# EAGLE board top (EAGLE 9.3.0)
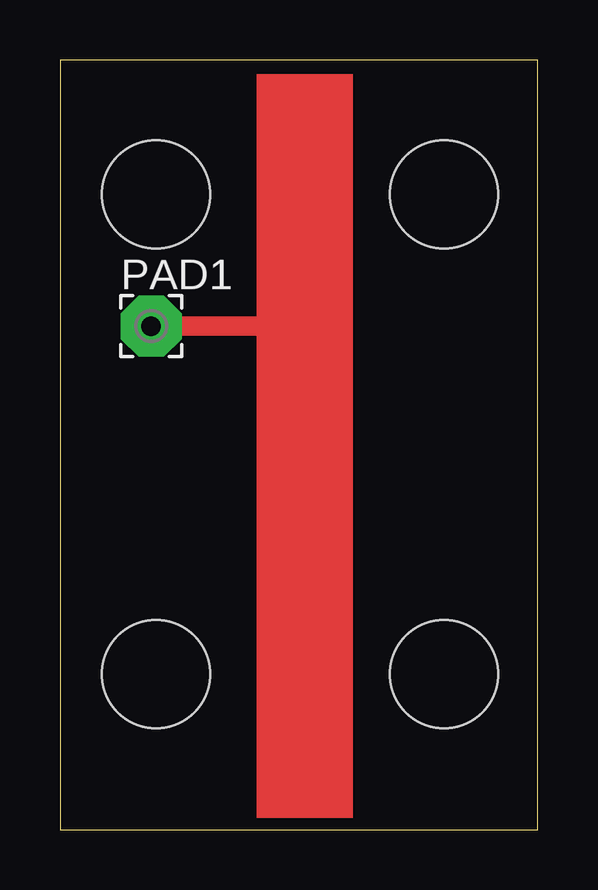
[diagram p0: board, top side]

Size 19.9 x 32.1 mm. Coordinates in mm from the lower left corner, seen from the top.
Outline: 0,0 19.9,0 19.9,32.1 0,32.1 0,0
Copper layers (1*16): Top 0.035mm / dielectric 1.5mm / Bottom 0.035mm
Design rules "default": minimum track width 6mil, minimum drill 0.35mm, track to track 6mil, track to pad 6mil, pad to pad 6mil, via to via 6mil, smd to smd 6mil, copper to edge 40mil, drill to drill 6mil, minimum pad ring 10mil, minimum via ring 8mil, stop-mask expansion 4mil, vias tented up to drill 0mil, thermal gap 10mil
Holes 4.5 mm at 4,26.5 4,6.5 16,26.5 16,6.5

## Footprints (pad centres in the part's own frame; a part is rotated, then mirrored left to right if it is on the bottom)
2,54/0,8 = drill 0.813 pad 2.54 octagon: 1 0,0

## Placement (x,y rotation side)
PAD1  [2,54/0,8]  3.8,21 0 top

## Library data of the parts
PAD1 = wirepad

## Nets
N$1: PAD1.1

## Tracks (layer width: path | path; a pad name or v marks a point on that pad's centre or on a via)
N$1
  Top 0.813: 9.6,21 PAD1.1
(copper drawn outside any net)
  shapes: Top area x1